# EAGLE board UTX_EE445M_Front_LiDAR_Board_2 (EAGLE 9.2.2)
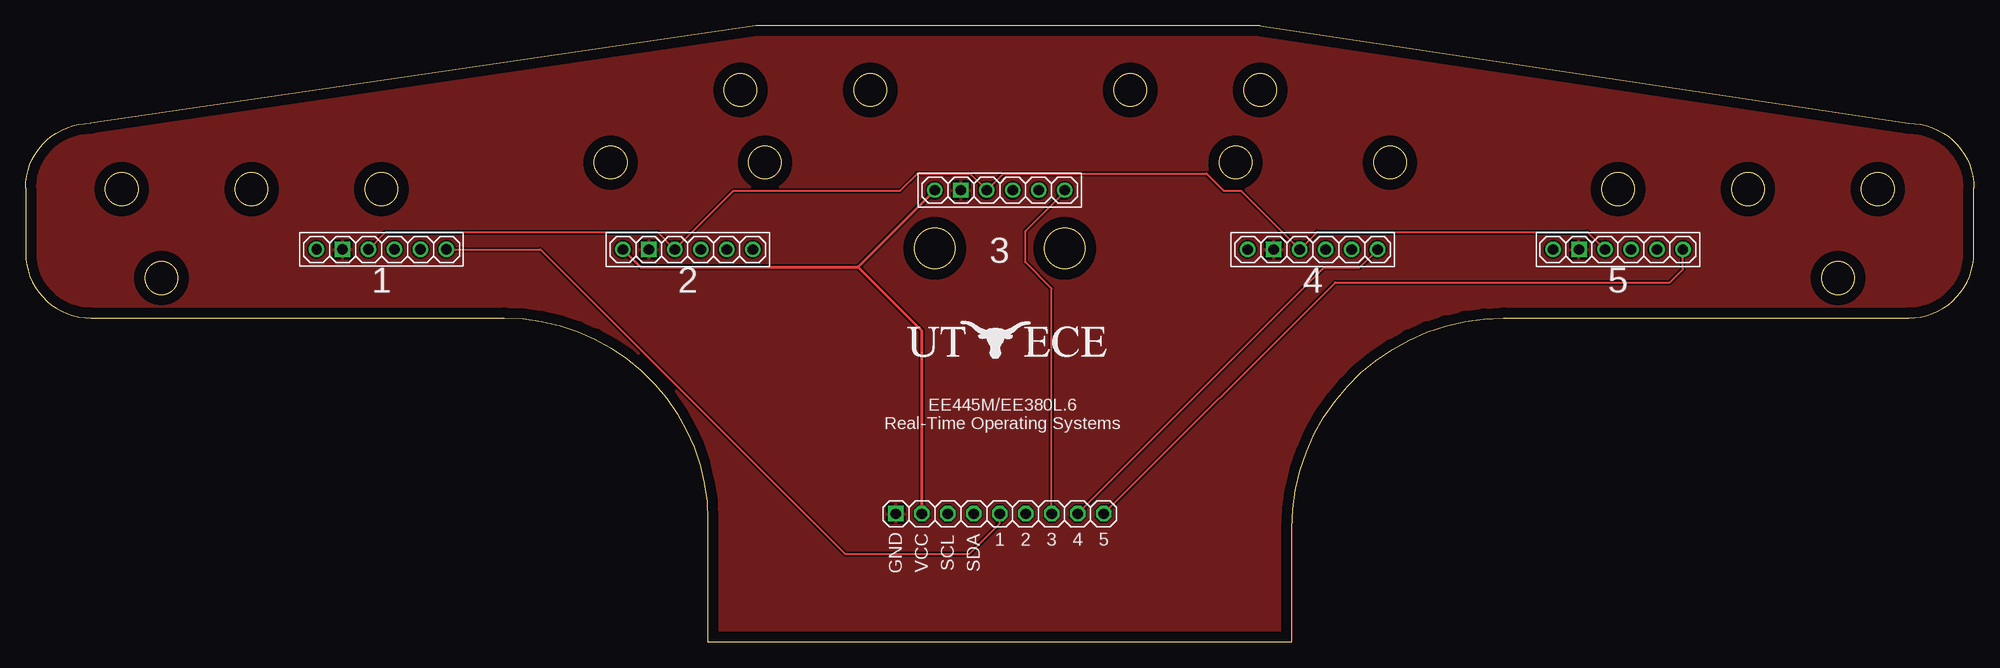
[diagram p0: board, top side]
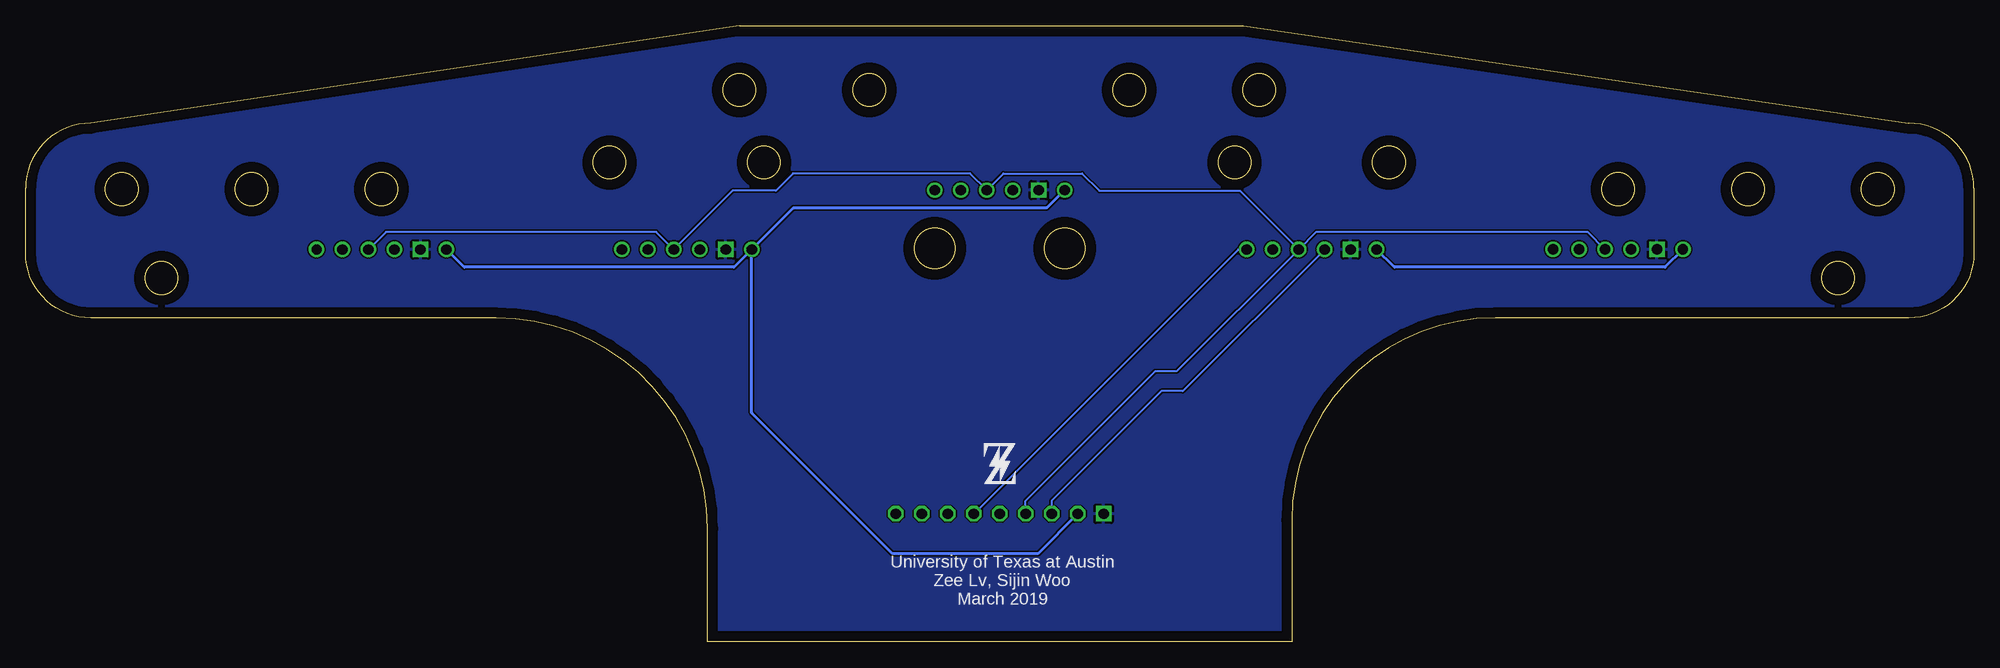
[diagram p1: board, bottom side, seen from below]

Size 190.5 x 60.3 mm. Coordinates in mm from the lower left corner, seen from the top.
Outline: 190.5,38.05 190.5,44.4 arc90 184.15,50.75 120.7,60.3 71.4,60.3 6.35,50.75 arc90 0,44.4 0,38.05 arc90 6.35,31.7 46.8,31.7 arc-90 66.7,11.9 66.7,0 123.8,0 123.8,11.1 arc-90 144.5,31.7 184.15,31.7 arc90 190.5,38.05
Outline: circle at 88.9,38.5 radius 2
Outline: circle at 101.6,38.5 radius 2
Outline: circle at 82.6,54 radius 1.6
Outline: circle at 108,54 radius 1.6
Outline: circle at 177.2,35.6 radius 1.6
Outline: circle at 13.3,35.6 radius 1.6
Outline: circle at 9.4,44.3 radius 1.6
Outline: circle at 34.8,44.3 radius 1.6
Outline: circle at 22.1,44.3 radius 1.6
Outline: circle at 120.7,54 radius 1.6
Outline: circle at 69.9,54 radius 1.6
Outline: circle at 118.3,46.9 radius 1.6
Outline: circle at 72.3,46.9 radius 1.6
Outline: circle at 133.4,46.9 radius 1.6
Outline: circle at 57.2,46.9 radius 1.6
Outline: circle at 181.1,44.3 radius 1.6
Outline: circle at 168.4,44.3 radius 1.6
Outline: circle at 155.7,44.3 radius 1.6
Copper layers (1*16): Top 0.035mm / dielectric 1.5mm / Bottom 0.035mm
Design rules "default": minimum track width 6mil, minimum drill 0.35mm, track to track 6mil, track to pad 6mil, pad to pad 6mil, via to via 6mil, smd to smd 6mil, copper to edge 40mil, drill to drill 6mil, minimum pad ring 10mil, minimum via ring 8mil, stop-mask expansion 4mil, vias tented up to drill 0mil, thermal gap 10mil

## Footprints (pad centres in the part's own frame; a part is rotated, then mirrored left to right if it is on the bottom)
UTX_EE445M_LIDAR_FRONT_BOARD_CONNECTOR_PTH = drill 1 square: GND -10.16,2.54 | drill 1 octagon: SCL -5.08,2.54; SDA -2.54,2.54; VCC -7.62,2.54; XSHUT1 0,2.54; XSHUT2 2.54,2.54; XSHUT3 5.08,2.54; XSHUT4 7.62,2.54; XSHUT5 10.16,2.54
LIDAR_VL53L0X_ATK_VERT = drill 1 square: GND -3.81,0 | drill 1: INT 3.81,0; SCL -1.27,0; SDA 1.27,0; VCC -6.35,0; XSH 6.35,0

## Placement (x,y rotation side)
U$1  UTX_EE445M_LIDAR_FRONT_BOARD_CONNECTOR_PTH  [UTX_EE445M_LIDAR_FRONT_BOARD_CONNECTOR_PTH]  95.25,10 0 top
U$2  LIDAR_VL53L0X_ATK_VERT  [LIDAR_VL53L0X_ATK_VERT]  34.8,38.41 0 top
U$3  LIDAR_VL53L0X_ATK_VERT  [LIDAR_VL53L0X_ATK_VERT]  64.75,38.4 0 top
U$4  LIDAR_VL53L0X_ATK_VERT  [LIDAR_VL53L0X_ATK_VERT]  95.25,44.2 0 top
U$5  LIDAR_VL53L0X_ATK_VERT  [LIDAR_VL53L0X_ATK_VERT]  125.85,38.4 0 top
U$6  LIDAR_VL53L0X_ATK_VERT  [LIDAR_VL53L0X_ATK_VERT]  155.7,38.4 0 top
U$7  [LOGO_UT_ECE_20X4]  85.78,27.46 0 top
U$8  [LOGO_Z_3X4]  96.77,15.44 0 bottom

## Library data of the parts
U$1-U$8 = Z

## Nets
GND: U$1.GND U$2.GND U$3.GND U$4.GND U$5.GND U$6.GND
N$1: U$3.INT
N$2: U$6.INT
N$3: U$4.INT
N$5: U$5.INT
N$13: U$2.INT
SCL: U$1.SCL U$2.SCL U$3.SCL U$4.SCL U$5.SCL U$6.SCL
SDA: U$1.SDA U$2.SDA U$3.SDA U$4.SDA U$5.SDA U$6.SDA
VCC: U$1.VCC U$2.VCC U$3.VCC U$4.VCC U$5.VCC U$6.VCC
XSHUT1: U$1.XSHUT1 U$2.XSH
XSHUT2: U$1.XSHUT2 U$3.XSH
XSHUT3: U$1.XSHUT3 U$4.XSH
XSHUT4: U$1.XSHUT4 U$5.XSH
XSHUT5: U$1.XSHUT5 U$6.XSH

## Tracks (layer width: path | path; a pad name or v marks a point on that pad's centre or on a via)
GND
  pour Bottom: 0,60.53 190.5,60.53 190.5,-0.05 0,-0.05
  pour Top: 0,60.53 190.5,60.53 190.5,-0.05 0,-0.05
SCL
  Top 0.203: U$2.SCL 35.2,40.08 61.8,40.08 U$3.SCL 69.23,44.15 72.05,44.15 72.05,44.14 72.55,44.14 72.55,44.15 85.52,44.15 87.2,45.82 92.36,45.82 U$4.SCL 95.6,45.82 115.47,45.82 117.14,44.14 118.84,44.14 120.43,42.55 121.11,41.87 U$5.SCL 126.29,40.11 152.72,40.11 U$6.SCL
  Bottom 0.203: U$3.SCL 77.34,24.54 79.45,24.54 90.17,13.82 U$1.SCL
SDA
  Bottom 0.203: U$2.SDA 37.77,40.11 64.31,40.11 U$3.SDA | U$6.SDA 155.26,40.11 128.83,40.11 U$5.SDA 121.38,44.14 117.14,44.14 115.47,45.82 98.14,45.82 U$4.SDA 94.9,45.82 87.2,45.82 85.52,44.15 72.55,44.15 72.55,44.14 72.05,44.14 72.05,44.15 71.77,44.15 U$3.SDA | U$1.SDA 92.71,13.82 80.03,26.49 77.93,26.49 U$3.SDA
VCC
  Top 0.305: U$3.VCC 60.15,36.65 81.35,36.65 81.38,36.68 | 81.38,36.68 U$4.VCC | U$1.VCC 87.63,30.43 81.38,36.68
  Bottom 0.305: U$2.VCC 30.21,36.65 56.65,36.65 U$3.VCC | U$4.VCC 90.66,42.44 115.46,42.44 U$5.VCC | U$5.VCC 121.25,36.65 147.6,36.65 U$6.VCC | U$1.VCC 91.53,8.64 105.72,8.64 119.5,22.42 U$5.VCC
XSHUT1
  Top 0.203: U$2.XSH 50.34,38.41 80.14,8.61 92.28,8.61 95.25,11.58 U$1.XSHUT1
XSHUT2
  Bottom 0.203: U$1.XSHUT2 71.93,38.4 U$3.XSH
XSHUT3
  Top 0.203: U$1.XSHUT3 100.33,34.6 97.77,37.16 97.77,40.18 101.6,44.02 U$4.XSH
XSHUT4
  Top 0.203: U$1.XSHUT4 126.96,36.63 130.43,36.63 U$5.XSH
XSHUT5
  Top 0.203: U$1.XSHUT5 128.05,35.18 160.78,35.18 162.05,36.45 U$6.XSH

## Text on the board
tPlace: 3 | 1 | 2 | 4 | 5 | EE445M/EE380L.6 / Real-Time Operating Systems
bPlace: University of Texas at Austin / Zee Lv, Sijin Woo / March 2019